# EAGLE board oneboard4 (EAGLE 7.5.0)
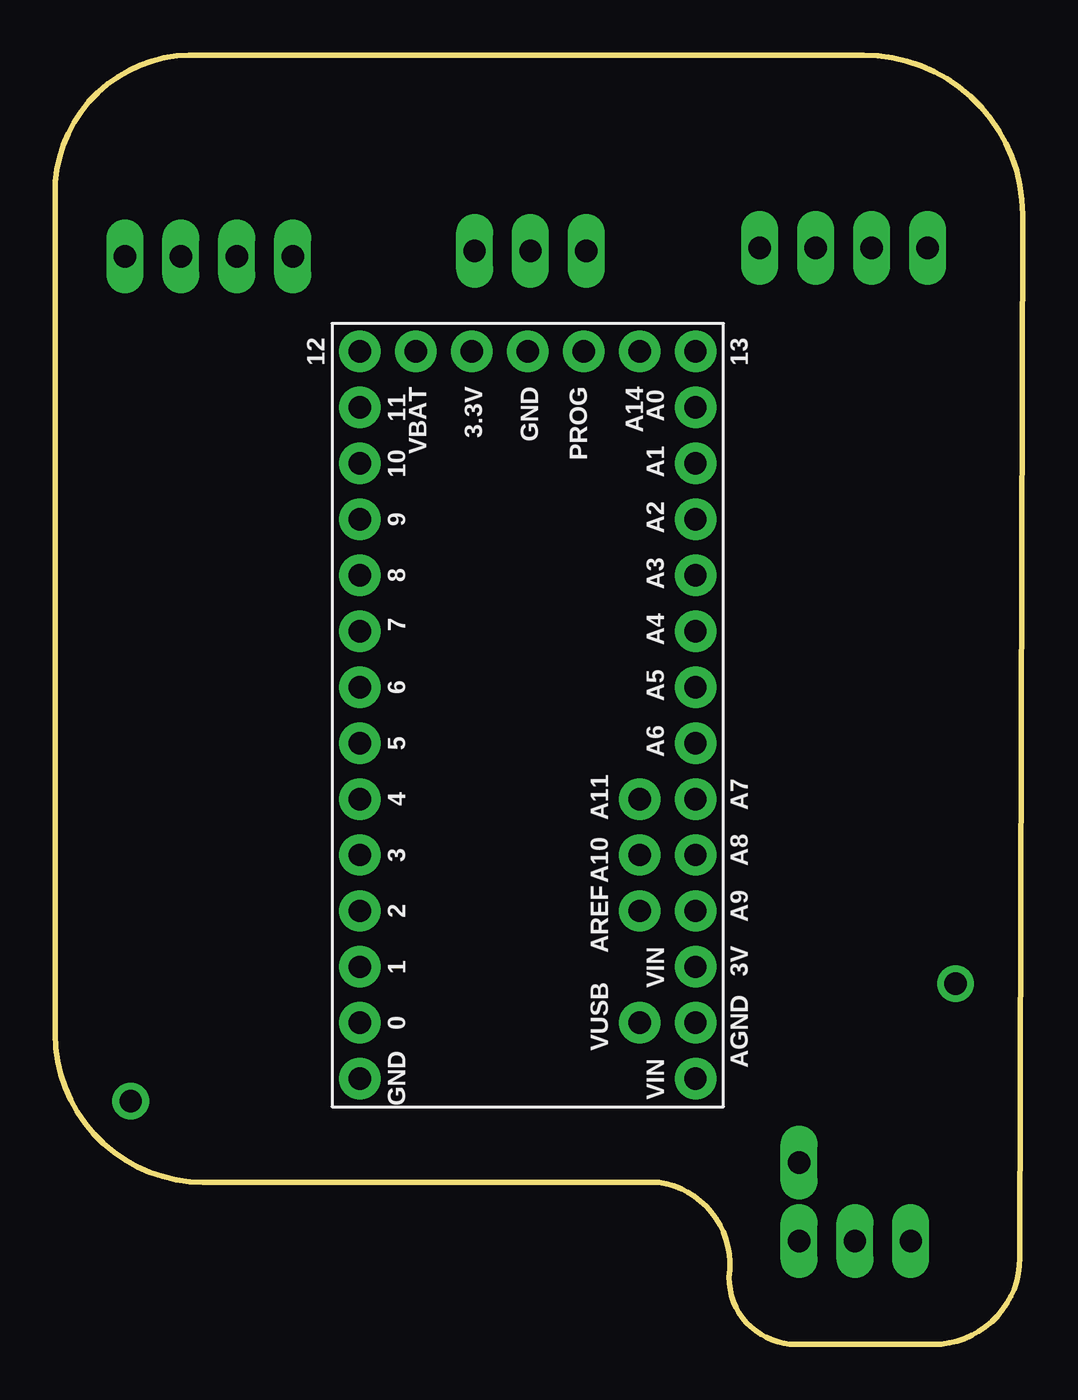
[diagram p0: board, top side]
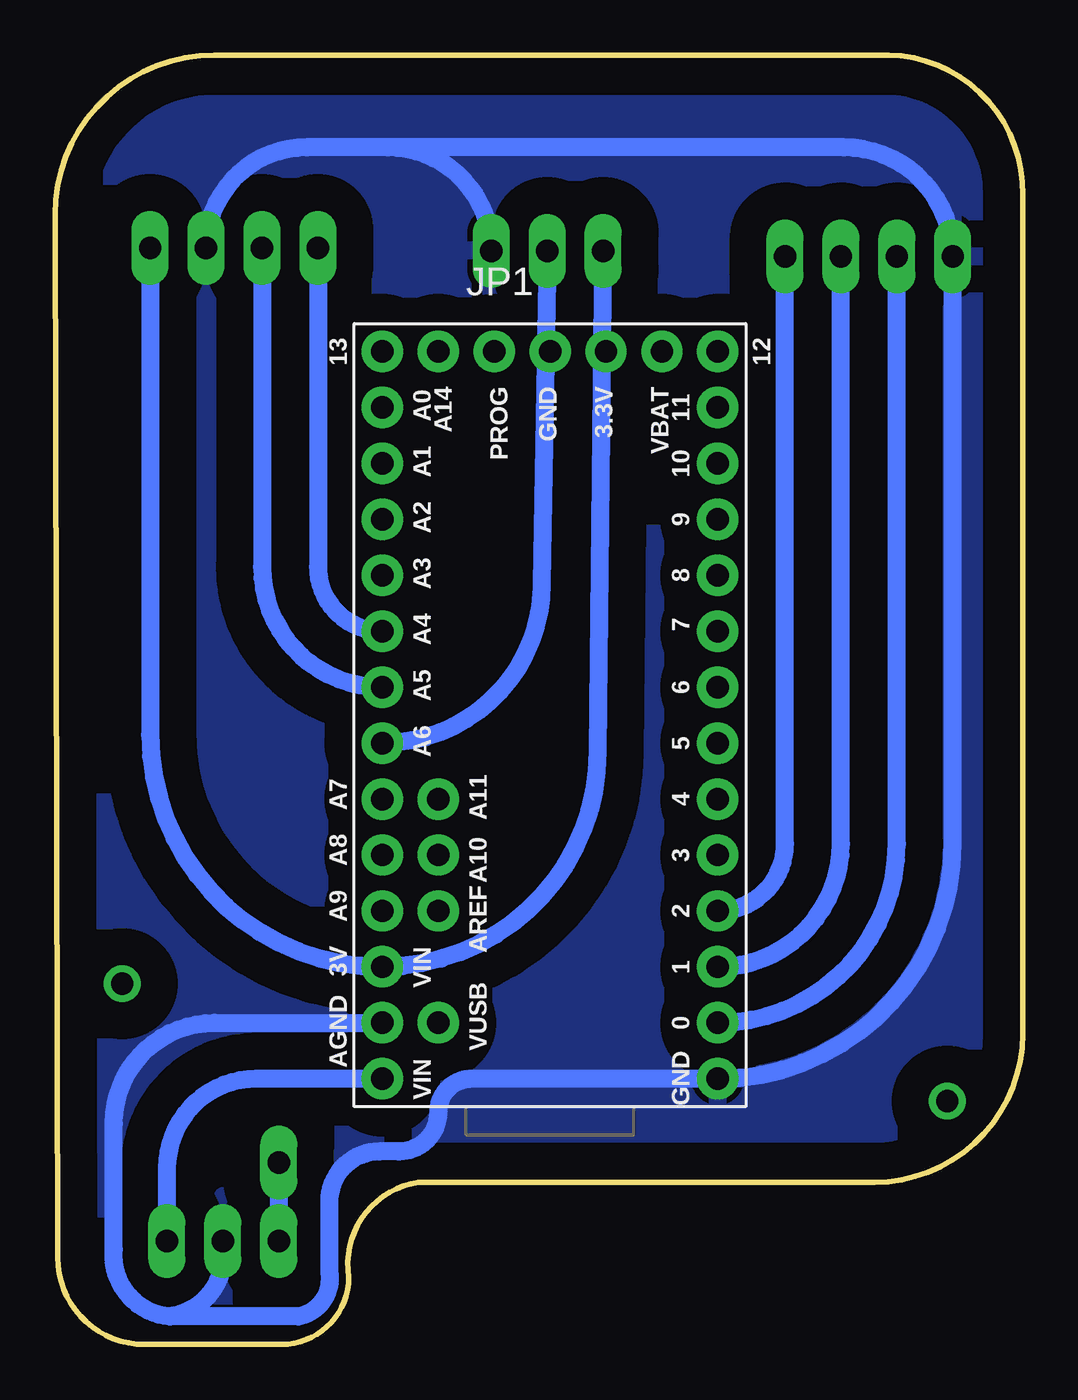
[diagram p1: board, bottom side, seen from below]

Size 43.94 x 58.55 mm. Coordinates in mm from the lower left corner, seen from the top.
Outline: 6.1,58.55 36.7,58.55 arc-90 43.94,51.31 43.81,3.94 arc-90 39.88,0 33.66,0 arc-90 30.61,3.05 arc90 27.43,7.37 6.73,7.37 arc-90 0,14.1 0,52.2 arc-90 6.1,58.55
Copper layers (1*16): Top 0.035mm / dielectric 1.5mm / Bottom 0.035mm
Design rules "default": minimum track width 10mil, minimum drill 24mil, track to track 8mil, track to pad 8mil, pad to pad 8mil, via to via 8mil, smd to smd 8mil, copper to edge 40mil, drill to drill 8mil, minimum pad ring 10mil, minimum via ring 8mil, stop-mask expansion 4mil, vias tented up to drill 0mil, thermal gap 10mil

## Footprints (pad centres in the part's own frame; a part is rotated, then mirrored left to right if it is on the bottom)
TEENSY-3.1 = drill 1.016 pad 1.88: 0 16.51,3.81; 1 16.51,6.35; 2 16.51,8.89; 3 16.51,11.43; 3.3V 11.43,34.29; 3V 1.27,6.35; 4 16.51,13.97; 5 16.51,16.51; 6 16.51,19.05; 7 16.51,21.59; 8 16.51,24.13; 9 16.51,26.67; 10 16.51,29.21; 11 16.51,31.75; 12 16.51,34.29; 13 1.27,34.29; 14 1.27,31.75; 15 1.27,29.21; 16 1.27,26.67; 17 1.27,24.13; 18 1.27,21.59; 19 1.27,19.05; 20 1.27,16.51; 21 1.27,13.97; 22 1.27,11.43; 23 1.27,8.89; A10 3.81,11.43; A11 3.81,13.97; A14/DAC 3.81,34.29; AGND 1.27,3.81; AREF 3.81,8.89; GND 8.89,34.29; GND1 16.51,1.27; PROG 6.35,34.29; VBAT 13.97,34.29; VIN 1.27,1.27; VUSB 3.81,3.81
HEADER-3 = drill 1.016 pad 1.676 long: 1 0,0; 2 0,2.54; 3 0,5.08
HEADER-1 = drill 1.016 pad 1.676 long: 1 0,0
HEADER-4 = drill 1.016 pad 1.676 long: 1 0,0; 2 0,2.54; 3 0,5.08; 4 0,7.62

## Placement (x,y rotation side)
JP1  TEENSY-3.1SILK  [TEENSY-3.1]  30.35,10.79 0 bottom
U$1  HEADER-3  [HEADER-3]  38.86,4.7 90 top
U$2  HEADER-3  [HEADER-3]  24.13,49.66 90 top
U$3  HEADER-1  [HEADER-1]  33.78,8.26 90 top
U$4  HEADER-4  [HEADER-4]  39.62,49.78 90 top
U$5  HEADER-4  [HEADER-4]  10.79,49.4 90 top

## Library data of the parts
JP1 = SparkFun-Boards; SF_ID: DEV-12646
U$1-U$5 = homemade-hardware

## Nets
GND: JP1.AGND JP1.GND1 U$1.2 U$2.1 U$4.2 U$5.4
N$1: JP1.1 U$5.2
N$2: JP1.0 U$5.3
N$4: JP1.2 U$5.1
N$6: U$1.3 U$3.1
NEO: JP1.20 U$2.2
SCL: JP1.19 U$4.3
SDA: JP1.18 U$4.4
VCC: JP1.3V U$2.3 U$4.1
VIN: JP1.VIN U$1.1

## Tracks (layer width: path | path; a pad name or v marks a point on that pad's centre or on a via)
GND
  Bottom 0.813: 28.83,54.36 8.13,54.36 arc90 U$5.4 3.17,22.73 arc90 JP1.GND1 25.02,12.06 arc-90 26.54,10.54 arc90 28.32,8.76 29.21,8.76 arc-90 31.5,6.48 31.5,3.3 arc90 32.89,1.27 38.73,1.27 | U$4.2 arc90 32.51,54.36 28.83,54.36 | U$2.1 arc-90 28.83,54.36 | U$1.2 36.32,4.44 arc90 38.73,1.27 | 38.73,1.27 arc90 41.28,4.32 41.28,10.03 arc90 36.7,14.6 JP1.AGND
  pour Bottom (isolate 1.676): -6.35,61.98 46.48,61.98 46.48,-4.19 -6.35,-4.19
N$1
  Bottom 0.813: JP1.1 arc-90 8.25,22.73 U$5.2
N$2
  Bottom 0.813: JP1.0 arc-90 5.71,22.73 U$5.3
N$3  (via drill 1 pad 1.68)
  other vias: 3.43,11.05
N$4
  Bottom 0.813: JP1.2 arc-90 10.79,22.73 U$5.1
N$5  (via drill 1 pad 1.68)
  other vias: 40.89,16.38
N$6
  Bottom 0.813: U$3.1 U$1.3
NEO
  Bottom 0.813: U$2.2 21.84,34.54 arc90 JP1.20
SCL
  Bottom 0.813: U$4.3 34.54,35.31 arc-90 JP1.19
SDA
  Bottom 0.813: U$4.4 32,35.31 arc-90 JP1.18
VCC
  Bottom 0.813: U$4.1 39.62,27.69 arc-90 JP1.3V arc-90 19.3,26.92 U$2.3
VIN
  Bottom 0.813: JP1.VIN 34.8,12.06 arc-90 38.86,8 U$1.1